# EAGLE board anodeShield (EAGLE 6.5.0)
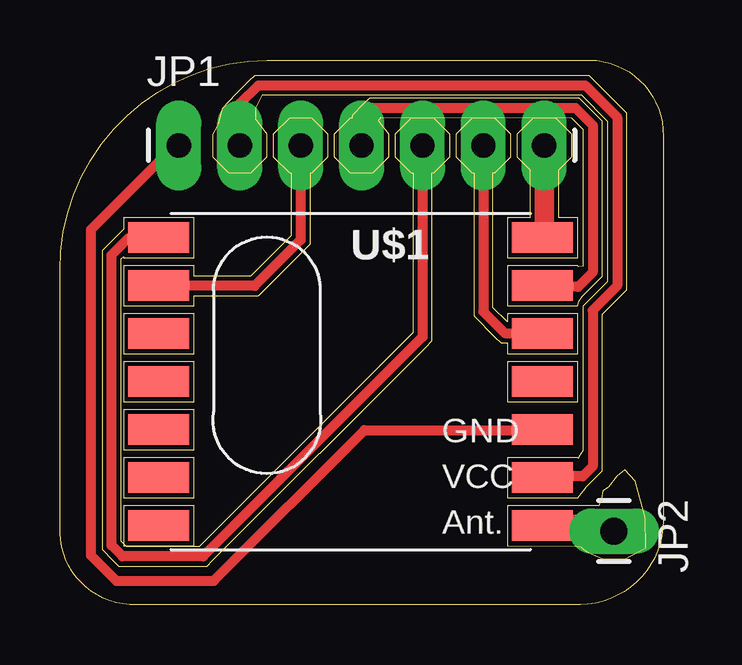
[diagram p0: board, top side]

Size 25.15 x 22.69 mm. Coordinates in mm from the lower left corner, seen from the top.
Outline: 2.9,0 arc-90 0,3.26 0,13.93 arc-90 8.64,22.69 22.1,22.69 arc-90 25.15,19.52 25.15,3.51 arc-90 21.7,0 2.9,0
Copper layers (1*16): Top 0.035mm / dielectric 1.5mm / Bottom 0.035mm
Design rules "default": minimum track width 10mil, minimum drill 24mil, track to track 8mil, track to pad 8mil, pad to pad 8mil, via to via 8mil, smd to smd 8mil, copper to edge 40mil, drill to drill 8mil, minimum pad ring 10mil, minimum via ring 8mil, stop-mask expansion 4mil, vias tented up to drill 0mil, thermal gap 10mil
Net classes: 1 power: width 0.406 mm
Milling: 191 lines

## Footprints (pad centres in the part's own frame; a part is rotated, then mirrored left to right if it is on the bottom)
1X07_LONGPADS = drill 1.016 pad 1.88 long: 1 0,0; 2 2.54,0; 3 5.08,0; 4 7.62,0; 5 10.16,0; 6 12.7,0; 7 15.24,0
1X01_LONGPAD = drill 1.118 pad 1.88 long: 1 0,0
RFM12B = smd 2.54 x 1.27: ANT 8,-6; FFS -8,2; GND 8,-2; IRQ -8,4; P$8 -8,0; P$9 -8,-2; P$10 -8,-4; P$12 -8,-6; P$16 8,0; SCK 8,4; SDI 8,2; SDO -8,6; SEL 8,6; VDD 8,-4

## Placement (x,y rotation side)
JP1  [1X07_LONGPADS]  4.96,19.13 0 top
JP2  M01PTH_LONGPAD  [1X01_LONGPAD]  23.1,3.06 270 top
U$1  RFM12B  [RFM12B]  12.12,9.28 0 top

## Library data of the parts
JP1 JP2 = SparkFun-Connectors
U$1 = JeeLabs

## Nets
GND [power]: JP1.1 U$1.GND
N$1: JP1.7 U$1.SEL
N$2: JP1.4 U$1.SCK
N$3: JP1.6 U$1.SDI
N$4: JP1.5 U$1.SDO
N$5: JP1.3 U$1.IRQ
N$6: JP2.1 U$1.ANT
VCC [power]: JP1.2 U$1.VDD

## Tracks (layer width: path | path; a pad name or v marks a point on that pad's centre or on a via)
GND
  Top 0.406: JP1.1 4.79,19.13 1.29,15.62 1.29,2.05 2.34,0.99 6.42,0.99 12.69,7.27 20.1,7.27 U$1.GND
N$1
  Top 0.813: JP1.7 20.2,15.36 U$1.SEL
N$2
  Top 0.406: JP1.4 12.58,20.2 13.07,20.69 21.49,20.69 22.21,19.97 22.21,13.85 21.61,13.24 20.16,13.24 U$1.SCK
N$3
  Top 0.406: JP1.6 17.66,12.2 18.55,11.31 20.09,11.31 U$1.SDI
N$4
  Top 0.406: JP1.5 15.12,11.16 5.97,2.01 2.61,2.01 2.16,2.46 2.16,14.57 2.87,15.28 U$1.SDO
N$5
  Top 0.406: JP1.3 10.04,15.19 8.12,13.28 U$1.IRQ
N$6
  Top 0.813: U$1.ANT 22.66,3.44 JP2.1
VCC
  Top 0.406: JP1.2 7.5,20.86 8.27,21.64 21.91,21.64 23.23,20.31 23.23,13.28 22.21,12.26 22.21,5.75 21.79,5.34 20.17,5.34 U$1.VDD